# Allegro board pt100.brd
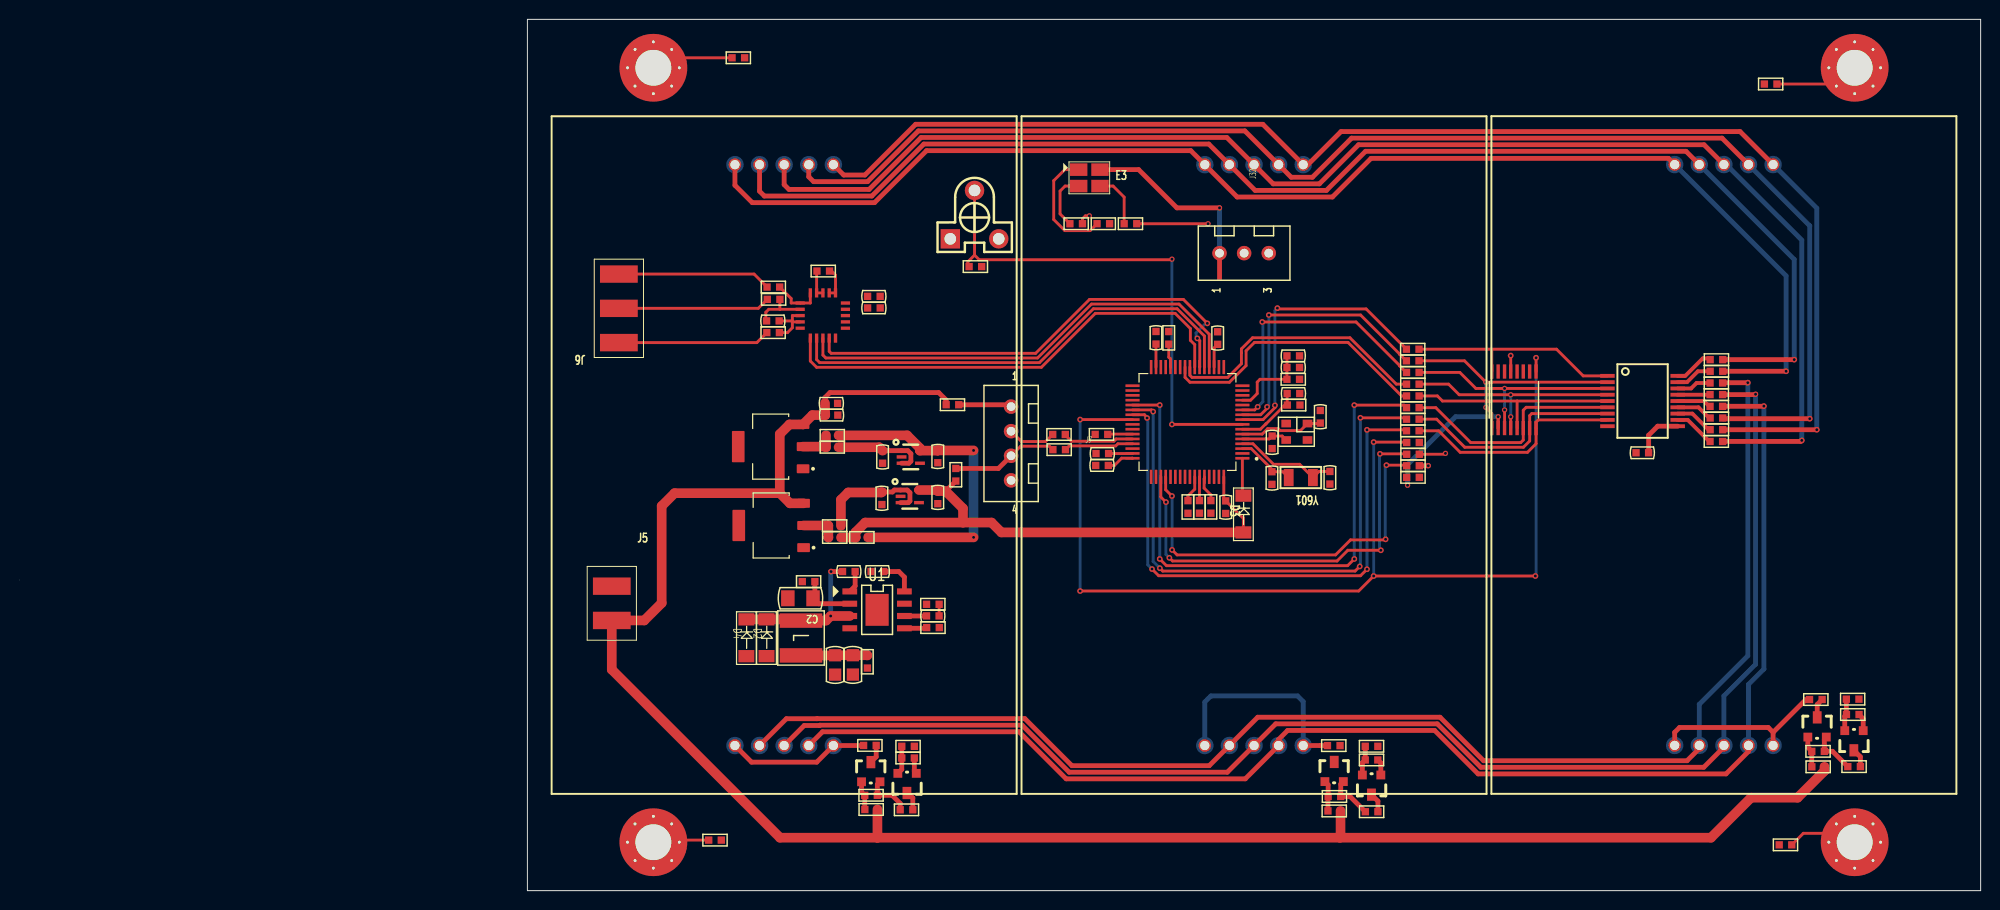
[diagram p0: board, top side]
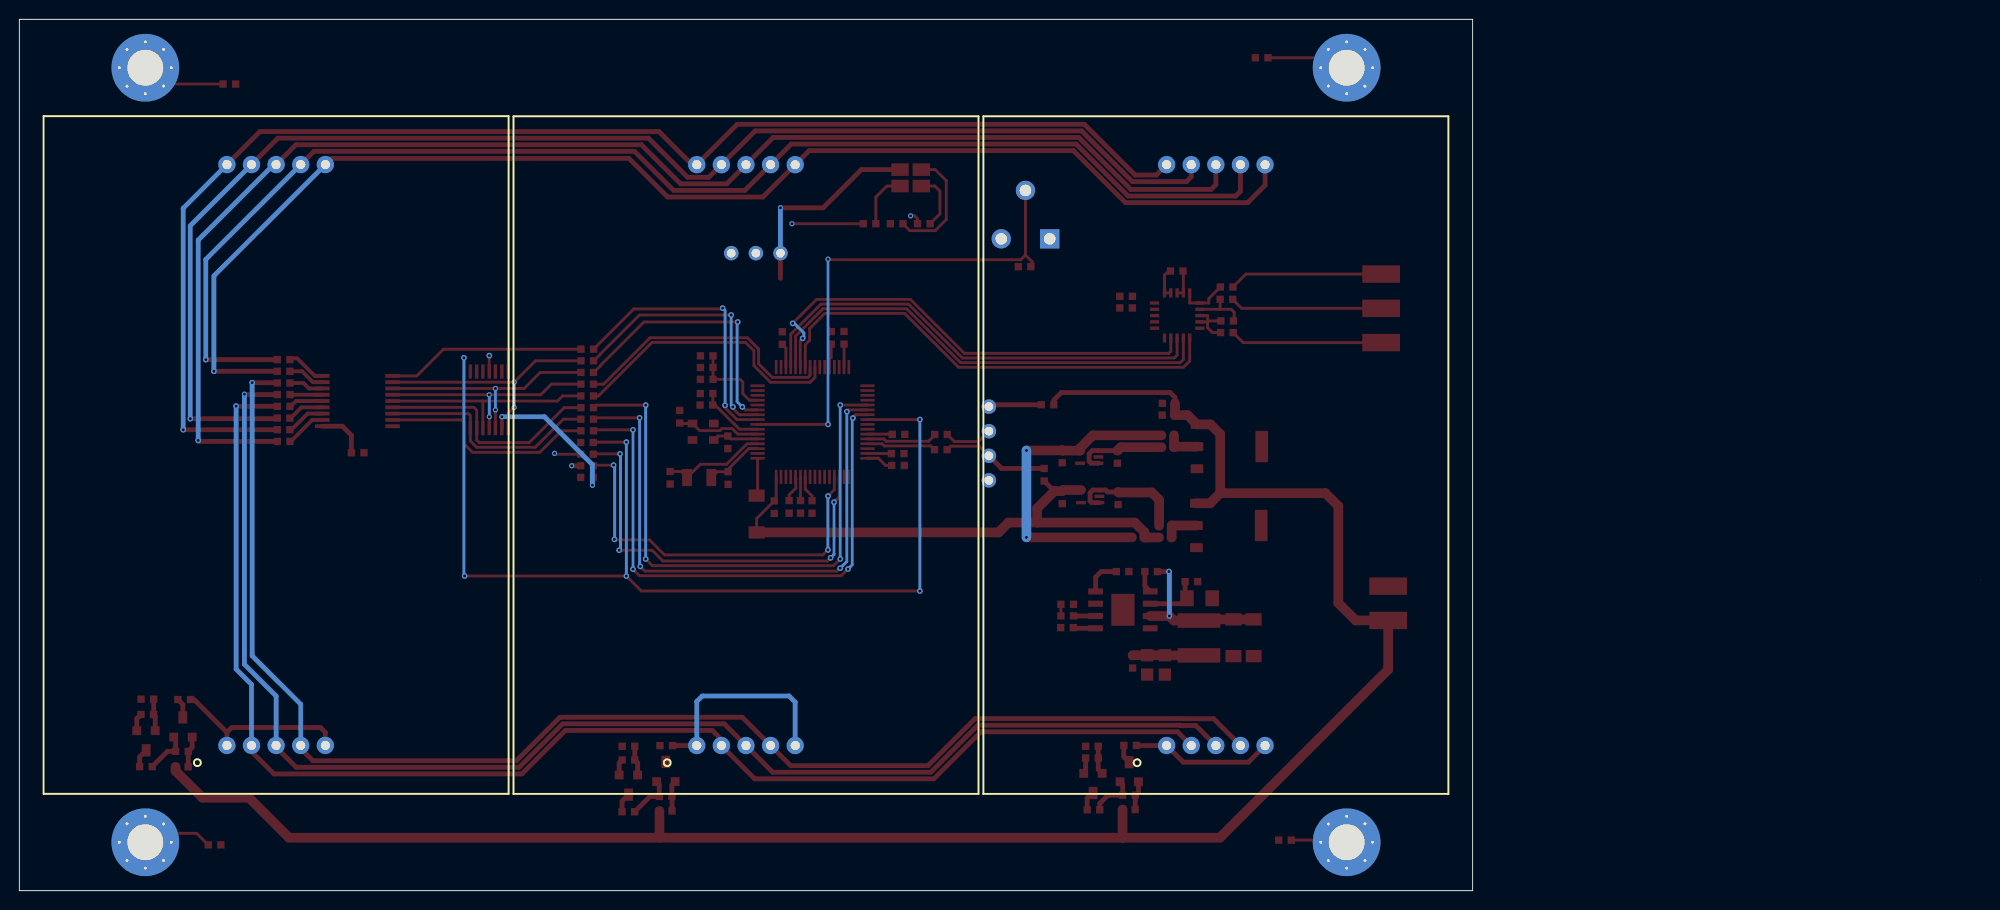
[diagram p1: board, bottom side, seen from below]

Outline 202.44 x 90 mm; copper layers: TOP, BOTTOM. Coordinates in mm from the lower left corner of the outline.
Outline path: 0,32.09 0,32.09 ; 52.44,90 52.44,0 202.44,0 202.44,90 52.44,90

## Design rules (mm)
nets with their own width: min track width 0.3; nets GND
nets with their own width: min track width 0.5; nets VBUS_R VCC12V VCC_3V3 VCC_3V3_R

## Placement (name value [footprint] x y rotation side)
C1  10nF/50V  [C0603]  86.27 32.96 180 top
C2  10uF/50V  [C1206]  80.62 30.2 180 top
C6  4.7nF/50V  [C0603]  93.64 28.38 0 top
C7  22uF/10V  [C0805]  84.2 24.31 270 top
C8  22uF/10V  [C0805]  86.03 24.32 270 top
C9  0.1uF/50V  [C0603]  89.21 32.96 180 top
C12  1uF/10V  [C0603]  89.03 41.18 270 top
C13  1uF/10V  [C0603]  94.8 41.27 270 top
C14  1uF/10V  [C0603]  89.1 45.45 270 top
C15  1uF/10V  [C0603]  94.8 45.5 270 top
C16  100nF/16V  [C0603]  132.16 51.35 180 top
C17  100nF/16V  [C0603]  112.4 43.92 180 top
C18  100nF/16V  [C0603]  117.32 56.46 90 top
C19  100nF/16V  [C0603]  112.43 45.15 180 top
C20  4.7uF/16V  [C0603]  123.69 56.43 90 top
C21  100nF/16V  [C0603]  124.52 40.26 270 top
C22  100nF/16V  [C0603]  130.84 54.04 0 top
C23  4.7uF/16V  [C0603]  130.84 55.24 0 top
C24  22pF/50V  [C0603]  129.31 46.96 270 top
C25  22pF/50V  [C0603]  134.28 48.3 90 top
C26  2.2pF/50V  [C0603]  129.29 43.27 270 top
C27  2.2pF/50V  [C0603]  135.27 43.3 270 top
C28  100nF/16V  [C0603]  88.86 60.19 180 top
C29  100nF/16V  [C0603]  88.85 61.39 180 top
C30  100nF/16V  [C0603]  78.43 58.85 180 top
C31  100nF/50V  [C0603]  166.87 45.23 0 top
C32  10uF/50V  [C0603]  84.46 50.34 180 top
C33  100nF/50V  [C0603]  84.48 49.12 180 top
D2  LMBR140FT1G  [SOD123]  77.12 28.02 270 top
D3  RB160M-30  [SOD123]  126.34 40.8 270 top
D4  LMBR140FT1G  [SOD123]  75.04 28.02 270 top
E3  RGB-LED  [LED_3528_2]  110.44 73.68 0 top
J1  TM1650  [SOP65P640X110-16N]  154.27 50.7 270 top
J2  CON10  [SEGS]  84.02 14.99 180 bottom
J3  CON10  [SEGS]  132.52 14.99 180 bottom
J4  CON10  [SEGS]  181.02 15 180 bottom
J5  CON2  [H2]  61.15 28.41 0 top
J6  CON3  [H3]  61.88 57.61 0 top
J7  4 HEADER  [XH-4]  102.37 46.19 0 top
J28  HOLE  [MTG370_700]  65.44 85 0 top
J29  HOLE  [MTG370_700]  189.44 85 0 top
J30  HOLE  [MTG370_700]  65.44 5 0 top
J31  HOLE  [MTG370_700]  189.44 5 0 top
J32  CON3  [XH-3]  126.42 65.85 90 top
L1  300R/100MHz  [R0603]  130.84 52.82 0 top
L2  60R/100MHz/2A  [R0603]  80.81 31.92 0 top
L3  4.7uH/2.2A  [L5020]  80.68 26.1 270 top
Q7  CJ3402(SOT23)  [SOT-23]  92.58 12.12 180 top
Q8  CJ2305  [SOT-23]  86.93 11.24 0 top
Q9  CJ3402(SOT23)  [SOT-23]  140.53 11.95 180 top
Q10  CJ2305  [SOT-23]  134.75 11.26 0 top
Q11  CJ3402(SOT23)  [SOT-23]  190.32 16.53 180 top
Q12  CJ2305  [SOT-23]  184.61 15.86 0 top
R3  75K/1%  [R0603]  87.53 22.99 90 top
R6  13.7K/1%  [R0603]  93.65 27.17 0 top
R7  15K  [R0603]  94.94 29.58 180 top
R13  RESISTOR TAPPED  [RH0812]  96.09 67.33 0 top
R14  10K  [R0603]  91.08 13.7 0 top
R20  1K  [R0603]  111.23 68.89 0 top
R21  510R  [R0603]  108.43 68.89 0 top
R22  330R  [R0603]  114.03 68.89 0 top
R30  100K  [R0603]  122.99 38.99 90 top
R31  4K7  [R0603]  132.18 50.16 180 top
R32  100K  [R0603]  118.64 57.75 270 top
R33  4K7  [R0603]  121.81 38.99 90 top
R34  4K7  [R0603]  120.62 38.98 90 top
R35  100K  [R0603]  98.03 64.46 0 top
R36  400R  [R0603]  83.63 64 180 top
R37  10K  [R0603]  78.48 62.35 180 top
R38  10K  [R0603]  78.5 61.08 180 top
R39  10K  [R0603]  78.45 57.64 180 top
R40  0R  [R0603]  143.17 55.93 0 top
R41  0R  [R0603]  143.17 54.73 0 top
R42  0R  [R0603]  143.18 53.53 0 top
R43  0R  [R0603]  143.18 52.32 0 top
R44  0R  [R0603]  143.18 51.1 0 top
R45  0R  [R0603]  143.18 49.89 0 top
R46  0R  [R0603]  143.18 48.7 0 top
R47  0R  [R0603]  143.18 47.5 0 top
R48  0R  [R0603]  143.2 46.29 0 top
R49  0R  [R0603]  143.2 45.08 0 top
R50  0R  [R0603]  143.2 43.89 0 top
R51  0R  [R0603]  143.2 42.69 0 top
R52  0R  [R0603]  83.5 37.7 0 top
R53  0R  [R0603]  83.26 45.8 0 top
R54  0R  [R0603]  83.51 36.48 0 top
R55  0R  [R0603]  83.26 47.03 0 top
R56  0R  [R0603]  87.61 36.49 180 top
R57  100R  [R0603]  174.52 54.85 0 top
R58  100R  [R0603]  174.52 53.65 0 top
R59  100R  [R0603]  174.51 52.44 0 top
R60  100R  [R0603]  174.51 51.24 0 top
R61  100R  [R0603]  174.51 50.03 0 top
R62  100R  [R0603]  174.52 48.82 0 top
R63  100R  [R0603]  174.52 47.61 0 top
R64  100K  [R0603]  174.51 46.4 0 top
R65  1K  [R0603]  92.38 14.91 180 top
R66  10K  [R0603]  90.92 8.35 0 top
R67  10K  [R0603]  88.44 15 180 top
R68  1K  [R0603]  88.56 9.85 180 top
R69  1K  [R0603]  88.57 8.38 180 top
R70  1K  [R0603]  140.22 14.91 180 top
R71  10K  [R0603]  138.92 13.5 0 top
R72  10K  [R0603]  138.93 8.15 0 top
R73  10K  [R0603]  136.32 14.98 180 top
R74  1K  [R0603]  136.37 8.23 180 top
R75  1K  [R0603]  136.39 9.73 180 top
R76  1K  [R0603]  189.88 19.78 180 top
R77  10K  [R0603]  188.59 18.19 0 top
R78  10K  [R0603]  188.73 12.81 0 top
R79  10K  [R0603]  186.08 19.74 180 top
R80  1K  [R0603]  186.32 12.79 180 top
R81  1K  [R0603]  186.31 14.39 180 top
R82  100K  [R0603]  111.04 47.13 0 top
R83  0R  [R0603]  95.66 50.19 0 top
R862  0R  [R0603]  73.56 86.03 0 top
R863  0R  [R0603]  181.42 83.32 180 top
R864  0R  [R0603]  71.15 5.22 0 top
R865  0R  [R0603]  182.95 4.73 180 top
R866  22R  [R0603]  106.66 47.12 0 top
R867  22R  [R0603]  106.68 45.55 0 top
R868  1.5K  [R0603]  96.66 43.61 270 top
U1  SGM6132YPS8G/TR  [SOIC8-EP]  88.53 29 0 top
U3  SGM2019-3.3YC5G/TR  [SC70-5]  91.91 40.73 0 top
U4  SGM2019-3.3YC5G/TR  [SC70-5]  92.01 44.8 0 top
U5  STM32F405RGT6  [QFP50P1200X1200X160-64N]  120.57 48.41 180 top
U6  MAX31865ATP+  [TQFN-20]  82.57 59.02 180 top
U7  TD62083AF  [SSOP18]  167.55 50.57 270 top
U8  AMS1117-33  [SOT229P700X180-4N]  79.6 37.72 90 top
U9  AMS1117-33  [SOT229P700X180-4N]  79.55 45.87 90 top
Y2  12MHz/12pF/30ppm  [OSC3225]  131.86 47.4 270 top
Y601  32.76KHz/12.5pF/20ppm  [OSC70X40]  132.27 42.67 180 top

## Library data of the parts
C1 C6-C9 C12-C33 = CAP NP: User Part Number: *; Tolerance: *
C2 = CAP NP
D2-D4 = DIODE
E3 = LED_3528_RGB
J1 = CON16C
J2-J4 = CON10
J5 = CON2
J6 J32 = CON3
J7 = 4 HEADER
J28-J31 = CON1: User Part Number: pn; Tolerance: RichardLC
L1 = BEAD: User Part Number: *; Tolerance: *
L2 = BEAD_SMALL: User Part Number: *; Tolerance: *
L3 = INDUCTOR
Q7 Q9 Q11 = MOSFET-N: room: Power_input
Q8 Q10 Q12 = MOSFET-P
R3 R6 R7 R14 R20-R22 R30-R83 R862-R868 = R: User Part Number: *; Tolerance: *
R13 = RESISTOR TAPPED
U1 = SGM6332
U3 U4 = PAM3101DBA330
U5 = STM32F405RGT6
U6 = MAX31865ATP+
U7 = TD62083
U8 U9 = AMS1117-33
Y2 = CRYSTAL-3225: Tolerance: RichardLC; User Part Number: pn
Y601 = CRYSTAL

## Footprints (pads in the part's own frame, mm; a bottom-side part is the same pattern mirrored in y, then rotated)
C0603
  rect 0.76x0.76 smd: 1(0,0) 2(1.3,0)
C0805
  rect 1.27x1.27 smd: 1(0,0) 2(2,0)
C1206
  rect 1.397x1.651 smd: 1(-1.297,0) 2(1.303,0)
H2
  rect 3.9x1.8 smd: 1(0,-0.5) 2(0,3.04)
H3
  rect 3.9x1.8 smd: 1(0,-1) 2(0,2.54) 3(0,6.08)
L5020
  rect 1.5x4.4 smd: 1(-1.8,0) 2(1.8,0)
LED_3528_2
  rect 1.8x1.3 smd: 1(-1.1,0.8) 2(-1.1,-0.9) 3(1.1,-0.9) 4(1.1,0.8)
MTG370_700
  round 1 hole 0.3: (-2.675,0) (-1.892,1.892) (-1.892,-1.892) (0,2.675) (0,-2.675) (1.892,1.892) (1.892,-1.892) (2.675,0)
  round 7 hole 3.7: 1(0,0)
OSC70X40
  rect 1.016x1.778 smd: 1(-1.25,0) 2(1.25,0)
OSC3225
  rect 0.8x1 smd: 1(-0.85,1.1) 2(-0.85,-1.1) 3(0.85,-1.1) 4(0.85,1.1)
QFP50P1200X1200X160-64N
  custom 1.47x0.28 smd: 1(-5.67,3.75) 2(-5.67,3.25) 3(-5.67,2.75) 4(-5.67,2.25) 5(-5.67,1.75) 6(-5.67,1.25) 7(-5.67,0.75) 8(-5.67,0.25) 9(-5.67,-0.25) 10(-5.67,-0.75) 11(-5.67,-1.25) 12(-5.67,-1.75) 13(-5.67,-2.25) 14(-5.67,-2.75) 15(-5.67,-3.25) 16(-5.67,-3.75) 33(5.67,-3.75) 34(5.67,-3.25) 35(5.67,-2.75) 36(5.67,-2.25) 37(5.67,-1.75) 38(5.67,-1.25) 39(5.67,-0.75) 40(5.67,-0.25) 41(5.67,0.25) 42(5.67,0.75) 43(5.67,1.25) 44(5.67,1.75) 45(5.67,2.25) 46(5.67,2.75) 47(5.67,3.25) 48(5.67,3.75)
  custom 0.28x1.47 smd: 17(-3.75,-5.67) 18(-3.25,-5.67) 19(-2.75,-5.67) 20(-2.25,-5.67) 21(-1.75,-5.67) 22(-1.25,-5.67) 23(-0.75,-5.67) 24(-0.25,-5.67) 25(0.25,-5.67) 26(0.75,-5.67) 27(1.25,-5.67) 28(1.75,-5.67) 29(2.25,-5.67) 30(2.75,-5.67) 31(3.25,-5.67) 32(3.75,-5.67) 49(3.75,5.67) 50(3.25,5.67) 51(2.75,5.67) 52(2.25,5.67) 53(1.75,5.67) 54(1.25,5.67) 55(0.75,5.67) 56(0.25,5.67) 57(-0.25,5.67) 58(-0.75,5.67) 59(-1.25,5.67) 60(-1.75,5.67) 61(-2.25,5.67) 62(-2.75,5.67) 63(-3.25,5.67) 64(-3.75,5.67)
R0603
  rect 0.76x0.76 smd: 1(0,0) 2(1.3,0)
RH0812
  round 2 hole 1.2: 1(5,0) 2(2.5,5)
  rect 2x2 hole 1.2: 3(0,0)
SC70-5
  rect 1.016x0.356 smd: 1(-0.95,0.65) 2(-0.95,0) 3(-0.95,-0.65) 4(0.95,-0.65) 5(0.95,0.65)
SEGS
  round 1.3 hole 0.95: 1(0,0) 2(2.54,0) 3(5.08,0) 4(7.62,0) 5(10.16,0) 6(10.16,60) 7(7.62,60) 8(5.08,60) 9(2.54,60) 10(0,60)
SOD123
  rect 1.27x1.651 smd: 1(3.8,0) 2(0,0)
SOIC8-EP
  rect 1.524x0.635 smd: 1(-2.819,1.905) 2(-2.819,0.635) 3(-2.819,-0.635) 4(-2.819,-1.905) 5(2.819,-1.905) 6(2.819,-0.635) 7(2.819,0.635) 8(2.819,1.905)
  rect 2.4x3.3 smd: 9(0,0)
SOP65P640X110-16N
  rect 1.473x0.356 smd: 1(-2.921,2.286) 2(-2.921,1.626) 3(-2.921,0.965) 4(-2.921,0.33) 5(-2.921,-0.33) 6(-2.921,-0.965) 7(-2.921,-1.626) 8(-2.921,-2.286) 9(2.921,-2.286) 10(2.921,-1.626) 11(2.921,-0.965) 12(2.921,-0.33) 13(2.921,0.33) 14(2.921,0.965) 15(2.921,1.626) 16(2.921,2.286)
SOT229P700X180-4N
  custom 0.93x1.31 smd: 1(-2.29,-1.345) 2(0,-1.345) 3(2.29,-1.345)
  custom 3.24x1.31 smd: 4(0,5.345)
SOT-23
  rect 0.914x0.914 smd: 1(1.905,0) 2(0,0)
  rect 0.914x1.27 smd: 3(0.965,2.032)
SSOP18
  rect 0.4x1.5 smd: 1(-2.6,-3.625) 2(-1.95,-3.625) 3(-1.3,-3.625) 4(-0.65,-3.625) 5(0,-3.625) 6(0.65,-3.625) 7(1.3,-3.625) 8(1.95,-3.625) 9(2.6,-3.625) 10(2.6,3.625) 11(1.95,3.625) 12(1.3,3.625) 13(0.65,3.625) 14(0,3.625) 15(-0.65,3.625) 16(-1.3,3.625) 17(-1.95,3.625) 18(-2.6,3.625)
TQFN-20
  rect 0.35x0.95 smd: BIAS(-1.67,-2.72) CS(-0.37,1.95) DGND(-1.67,1.95) FORCE+(0.93,-2.72) ISENSOR(0.28,-2.72) REFIN+(-1.02,-2.72) REFIN-(-0.37,-2.72) SCLK(0.28,1.95) SD0(-1.02,1.95) SDI(0.93,1.95)
  rect 0.95x0.35 smd: DRDY(-2.694,-0.374) DVDD(-2.694,-1.024) FORCE2(1.976,-1.675) FORCE-(1.976,0.276) GND1(-2.694,0.925) GND2(1.976,0.925) NC(-2.694,0.276) RTDIN+(1.976,-1.024) RTDIN-(1.976,-0.374) VDD(-2.694,-1.675)
XH-3
  round 1.5 hole 0.9: 1(0,2.54) 2(0,0) 3(0,-2.54)
XH-4
  round 1.5 hole 0.9: 1(0,3.81) 2(0,1.27) 3(0,-1.27) 4(0,-3.81)

## Nets
GND: C2.2 C7.2 C8.2 C9.2 C12.2 C13.2 C14.2 C15.2 C16.1 C17.2 C18.2 C19.2 C20.2 C21.2 C22.2 C23.2 C24.2 C25.2 C26.2 C27.2 C28.1 C29.1 C31.1 C32.1 C33.1 D2.1(A) D4.1(A) J1.4 J5.2 J7.4 J32.3 R6.2 R7.2 R13.1(A) R30.1 R32.1 R862.2 R863.2 R864.2 R865.2 U1.4(GND) U1.9(EP) U3.2(GND) U4.2(GND) U5.12(VSSA) U5.18(VSS) U5.63(VSS__1) U6.DGND U6.GND1 U6.GND2 U7.9(GND) U8.1(ADJ/GND) U9.1(ADJ/GND) Y2.2(GND#2) Y2.4(GND#4)
VBUS_R: C14.1 J7.1 R53.2 R83.2 U4.1(VIN) U4.3(EN)
VCC12V: C32.2 C33.2 J5.1 L2.1 R69.1 R74.1 R80.1 R83.1 U8.3(VIN) U9.3(VIN)
VCC_3V3: C7.1 C8.1 C13.1 C17.1 C20.1 C21.1 D3.1(A) E3.4(COM) J1.10 J32.1 L1.2 L3.2 R3.2 R31.1 R33.1 R34.1 R54.2 R56.2 R82.1 R868.2 U3.5(VOUT) U5.19(VDD) U5.32(VDD__1) U5.48(VDD__2) U5.64(VDD__3)
VCC_3V3_R: C15.1 C28.2 C29.2 R35.2 R55.2 R56.1 U4.5(VOUT) U6.DVDD U6.VDD
A: J1.8 R40.2 U7.1(I1)
B: J1.9 R41.2 U7.2(I2)
C: J1.11 R42.2 U7.3(I3)
D: J1.12 R43.2 U7.4(I4)
DIG1: R48.2 R65.1
DIG2: R49.2 R70.1
DIG3: R50.2 R76.1
DIG4: R51.2
DP: J1.16 R47.2 U7.8(I8)
DRDY: U6.DRDY
E: J1.13 R44.2 U7.5(I5)
F: J1.14 R45.2 U7.6(I6)
G: J1.15 R46.2 U7.7(I7)
OUT_A: J2.7 J3.7 J4.7 R57.2
OUT_B: J2.6 J3.6 J4.6 R58.2
OUT_C: J2.4 J3.4 J4.4 R59.2
OUT_D: J2.3 J3.3 J4.3 R60.2
OUT_DP: J2.8 J3.8 J4.8 R64.2
OUT_E: J2.2 J3.2 J4.2 R61.2
OUT_F: J2.9 J3.9 J4.9 R62.2
OUT_G: J2.10 J3.10 J4.10 R63.2
PA0: U5.14(PA0/WKUP)
PA1: U5.15(PA1/USART2_RTS)
PA2: U5.16(PA2/USART2_TX)
PA3: U5.17(PA3/USART2_RX)
PA4_X5: U5.20(PA4/USART2_CK) U6.CS
PA5_X6: U5.21(PA5/SPI1_SCK) U6.SCLK
PA6_X7: U5.22(PA6/SPI1_MISO) U6.SD0
PA7_X8: U5.23(PA7/SPI1_MOSI) U6.SDI
PA8: U5.41(PA8)
PA9: U5.42(PA9)
PA10: R82.2 U5.43(PA10)
PA11-DM: R866.2 U5.44(PA11)
PA12-DP: R867.2 U5.45(PA12)
PA13: U5.46(PA13/JMS-SWDIO)
PA14: U5.49(PA14/JTCK-SWCLK)
PA15: U5.50(PA15)
PB0: U5.26(PB0)
PB1: U5.27(PB1)
PB2: R32.2 U5.28(PB2/BOOT1)
PB3: U5.55(PB3)
PB4: U5.56(PB4)
PB5: U5.57(PB5)
PB6_SCL: J1.2
PB6_SCL1: R34.2 U5.58(PB6)
PB7_SDA: J1.3
PB7_SDA1: R33.2 U5.59(PB7)
PB8: U5.61(PB8)
PB9: U5.62(PB9)
PB10: U5.29(PB10)
PB11: U5.30(PB11)
PB12: U5.33(PB12)
PB13: R20.2 U5.34(PB13)
PB14: R21.2 U5.35(PB14)
PB15: R22.2 U5.36(PB15)
PC0_X19: R13.2(TAP) R35.1 U5.8(PC0)
PC1: R40.1 U5.9(PC1)
PC2: R41.1 U5.10(PC2/SPI2_MISO)
PC3: R42.1 U5.11(PC3/SPI2_MOSI)
PC4: R43.1 U5.24(PC4)
PC5: R44.1 U5.25(PC5)
PC6: R45.1 U5.37(PC6)
PC7: R46.1 U5.38(PC7)
PC8: R47.1 U5.39(PC8)
PC9_DIG1: J1.1 R48.1 U5.40(PC9)
PC9_DIG2: J1.5
PC9_DIG3: J1.6
PC9_DIG4: J1.7
PC10_DIG2: R49.1 U5.51(PC10)
PC11_DIG3: R50.1 U5.52(PC11)
PC12_DIG4: R51.1 U5.53(PC12)
PC13: U5.2(PC13/RTC_OUT)
SHELL_CHS_GND1: J28.1 R862.1
SHELL_CHS_GND2: J29.1 R863.1
SHELL_CHS_GND3: J30.1 R864.1
SHELL_CHS_GND4: J31.1 R865.1
N16749596: C12.1 R52.2 U3.1(VIN) U3.3(EN)
N16823930: E3.1(R) R20.1
N16823933: E3.2(G) R21.1
N16823936: E3.3(B) R22.1
N16868265: J32.2 R30.2 U5.60(BOOT0)
N16868313: C16.2 R31.2 U5.7(NRST)
N16869129: C18.1 U5.31(VCAP_1)
N16869139: C19.1 U5.47(VCAP_2)
N16869862: C22.1 C23.1 L1.1 U5.13(VDDA)
N16870554: C26.1 U5.3(PC14/OSC32_IN) Y601.2
N16870563: C27.1 U5.4(PC15/OSC32_OUT) Y601.1
N16871213: C24.1 U5.5(PH0/OSC_IN) Y2.3(XOUT)
N16871216: C25.1 U5.6(PH1/OSC_OUT) Y2.1(XIN)
N16873755: R36.1 U6.BIAS U6.REFIN+
N16873767: R36.2 U6.ISENSOR U6.REFIN-
N16874223: R37.1 U6.FORCE2 U6.FORCE+
N16874262: C30.1 R39.1 U6.FORCE- U6.RTDIN-
N16874265: C30.2 R38.1 U6.RTDIN+
N16876063: J6.1 R39.2
N16876066: J6.2 R38.2
N16876069: J6.3 R37.2
N16877545: R57.1 U7.18(O1)
N16877549: R58.1 U7.17(O2)
N16877553: R59.1 U7.16(O3)
N16877557: R60.1 U7.15(O4)
N16877561: R61.1 U7.14(O5)
N16877565: R62.1 U7.13(O6)
N16877569: R63.1 U7.12(O7)
N16877573: R64.1 U7.11(O8)
N16877577: C31.2 U7.10(COMMEN)
N16881202: J2.1 J2.5 R67.2
N16881220: J3.1 J3.5 R73.2
N16881239: J4.1 J4.5 R79.2
N16882760: R52.1 R54.1 U8.2(VOUT)
N16882763: R53.1 R55.1 U9.2(VOUT)
N16884629: D3.2(K) U5.1(VBAT)
N16887232: Q7.1(GATE) R14.1 R65.2
N16887234: Q7.2(SOURCE) R14.2
N16887985: Q8.3(DRAIN) R67.1
N16888135: Q8.1(GATE) R66.1 R68.1
N16888148: Q8.2(SOURCE) R68.2 R69.2
N16889232: Q9.2(SOURCE) R71.2
N16889234: Q9.1(GATE) R70.2 R71.1
N16889252: Q10.3(DRAIN) R73.1
N16889280: Q10.1(GATE) R72.1 R75.1
N16889282: Q10.2(SOURCE) R74.2 R75.2
N16890007: Q11.1(GATE) R76.2 R77.1
N16890009: Q11.2(SOURCE) R77.2
N16890028: Q12.3(DRAIN) R79.1
N16890058: Q12.2(SOURCE) R80.2 R81.2
N16890062: Q12.1(GATE) R78.1 R81.1
N16893938: C2.1 L2.2 U1.2(IN)
N16893954: C9.1 U1.8(SS)
N16893996: C6.1 U1.6(COMP)
N16893998: R3.1 R6.1 U1.5(FB)
N16894036: C1.2 D2.2(K) D4.2(K) L3.1 U1.3(SW)
N16894056: C1.1 U1.1(BS)
N16899965: J7.2 R866.1
N16899968: J7.3 R867.1 R868.1
N168879501: Q7.3(DRAIN) R66.2
N168892401: Q9.3(DRAIN) R72.2
N168900031: Q11.3(DRAIN) R78.2
N168939841: C6.2 R7.1

Pads without a net: R13 3; U1 7; U3 4; U4 4; U5 54; U6 NC; U8 4; U9 4

## Via types
v1: diameter 0.6, hole 0.3, TOP to BOTTOM, 47 vias
v2: diameter 0.55, hole 0.3, TOP to BOTTOM, 15 vias

## Routing (per net, layer and track width the routed paths; a pad name or vN(x,y) marks a point on that pad's centre or on a via; arc(x,y) is an arc through that point)
VBUS_R: length 15
  TOP w0.5: U4.3 91.82,44.15 92.02,44.35 92.02,45.13 91.7,45.45 U4.1 C14.1 ; J7.1 102.18,50.19 R83.2
  TOP w1: R53.2 88.75,45.8 C14.1
VCC12V: length 204.9
  TOP w0.5: C32.2 83.16,50.94 83.67,51.45 94.89,51.45 95.66,50.68 R83.1
  TOP w1: U8.3 79.54,40.01 78.49,41.06 ; 88.57,5.47 78.51,5.47 61.15,22.83 J5.1 64.5,27.91 66.3,29.71 66.3,39.73 67.63,41.06 78.49,41.06 ; 88.57,5.47 136.31,5.47 ; 88.57,5.47 R69.1 ; C32.2 83.16,49.29 83.18,49.27 C33.2 81.86,49.12 U9.3 79.49,48.16 78.49,47.16 78.49,41.06 ; R74.1 136.37,5.53 136.31,5.47 ; 136.31,5.47 174.61,5.47 178.74,9.6 183.55,9.6 186.32,12.37 R80.1
VCC_3V3: length 105.9
  TOP w0.3: U5.64 124.32,40.46 C21.1 126.34,38.44 D3.1 ; C20.1 123.32,56.06 U5.19 ; C17.1 113.03,43.92 113.78,44.67 114.89,44.67 U5.48
  TOP w0.356: J1.10 v2(152.64,48.95)
  TOP w0.5: J32.1 123.88,63.25 ; v2(123.88,70.53) 119.48,70.53 115.53,74.48 E3.4 ; R868.2 95.62,41.27 95.61,41.27
  TOP w1: R54.2 86.3,36.48 R56.2 86.31,37.02 87.31,38.02 97.4,38.02 ; L3.2 84.18,24.3 C7.1 86.03,24.31 C8.1 87.5,24.32 R3.2 ; 97.4,38.02 97.4,39.48 95.61,41.27 C13.1 94.69,41.38 U3.5 ; 97.4,38.02 100.35,38.02 101.37,37 D3.1
  BOTTOM w0.5: v2(143.29,41.88) 143.29,44 148.24,48.95 v2(152.64,48.95) ; v2(123.88,70.53) J32.1
VCC_3V3_R: length 34.6
  TOP w1: R56.1 v1(98.49,36.49) ; R55.2 91.63,47.03 92.96,45.7 U4.5 94.75,45.45 C15.1 94.83,45.47 v1(98.49,45.47)
  BOTTOM w1: v1(98.49,36.49) v1(98.49,45.47)
A: length 22.9
  TOP w0.3: R40.2 151.98,55.93 ; 151.98,55.93 158.66,55.93 161.41,53.17 U7.1 ; 151.98,55.93 J1.8
B: length 25.4
  TOP w0.3: U7.2 v2(151.37,52.52) 149.16,54.73 R41.2 ; J1.9 151.98,49.31 v2(151.37,49.92)
  BOTTOM w0.3: v2(151.37,49.92) v2(151.37,52.52)
C: length 24.2
  TOP w0.3: J1.11 v2(153.3,49.66) ; R42.2 148.68,53.53 150.34,51.87 v2(153.3,51.87) U7.3
  BOTTOM w0.3: v2(153.3,49.66) v2(153.3,51.87)
D: length 23.3
  TOP w0.3: J1.12 v2(153.94,48.95) ; U7.4 v2(153.94,51.22) 148.62,51.22 147.52,52.32 R43.2
  BOTTOM w0.3: v2(153.94,48.95) v2(153.94,51.22)
DIG2: length 2.7
  TOP w0.3: R49.2 147.11,45.08 v2(147.2,45.17)
DIG3: length 0.9
  TOP w0.5: R50.2 v2(145.43,43.89)
DP: length 23.1
  TOP w0.3: R47.2 146.5,47.5 148.72,45.27 155.66,45.27 156.55,46.16 J1.16 156.55,48.39 156.79,48.62 U7.8
E: length 22.5
  TOP w0.3: 154.6,50.57 J1.13 ; 154.6,50.57 146.89,50.57 146.37,51.1 R44.2 ; 154.6,50.57 U7.5
F: length 24.2
  TOP w0.3: U7.6 155.53,49.92 155.23,49.62 J1.14 155.23,46.55 154.96,46.28 149.81,46.28 146.2,49.89 R45.2
G: length 23.6
  TOP w0.3: R46.2 146.29,48.7 149.19,45.8 155.25,45.8 155.89,46.45 J1.15 155.89,49.06 156.1,49.27 U7.7
OUT_A: length 138
  TOP w0.5: J2.7 76.4,72.25 76.9,71.75 87.99,71.75 93.36,77.12 122.77,77.12 J3.7 127.56,72.33 134.91,72.33 138.95,76.37 172.03,76.37 J4.7 ; R57.2 v1(183.2,54.85)
  BOTTOM w0.5: v1(183.2,54.85) 183.2,65.2 J4.7
OUT_B: length 138.7
  TOP w0.5: R58.2 v1(182.36,53.65) ; J4.6 170.22,75.64 139.52,75.64 135.53,71.65 125.7,71.65 J3.6 120.91,76.44 93.64,76.44 88.27,71.07 75.65,71.07 73.86,72.86 J2.6
  BOTTOM w0.5: v1(182.36,53.65) 182.36,63.5 J4.6
OUT_C: length 147.1
  TOP w0.5: J2.4 79.17,17.76 82.33,17.76 82.34,17.77 103.78,17.77 108.64,12.91 122.82,12.91 J3.4 127.82,17.91 146.64,17.91 151.13,13.42 172.14,13.42 173.4,14.68 J4.4 ; R59.2 175.84,52.47 v1(178.41,52.47)
  BOTTOM w0.5: J4.4 173.4,19.25 178.41,24.26 v1(178.41,52.47)
OUT_D: length 145.9
  TOP w0.5: R60.2 179.17,51.24 v2(179.21,51.28) ; J4.3 175.94,14.82 173.86,12.74 150.85,12.74 146.36,17.23 129.68,17.23 J3.3 124.68,12.23 108.36,12.23 103.5,17.09 82.62,17.09 82.59,17.06 81.01,17.06 J2.3
  BOTTOM w0.5: J4.3 175.94,20.11 179.21,23.38 v2(179.21,51.28)
OUT_DP: length 146.2
  TOP w0.5: v1(183.98,46.51) 183.87,46.4 R64.2 ; J2.8 78.94,72.93 79.44,72.43 87.71,72.43 93.08,77.8 124.63,77.8 J3.8 129.42,73.01 134.19,73.01 138.23,77.05 173.89,77.05 J4.8
  BOTTOM w0.5: v1(183.98,46.51) 183.98,67.2 176.18,75 J4.8
OUT_E: length 145.5
  TOP w0.5: R61.2 180.05,50.03 v1(180.07,50.05) ; J2.2 82.9,16.41 103.19,16.41 108.05,11.55 126.54,11.55 J3.2 129.98,15.62 130.91,16.55 146.08,16.55 150.57,12.06 176.16,12.06 178.48,14.38 J4.2
  BOTTOM w0.5: v1(180.07,50.05) 180.07,22.89 178.48,21.3 J4.2
OUT_F: length 143.3
  TOP w0.5: J2.9 81.48,73.74 81.98,73.24 87.55,73.24 92.79,78.48 126.49,78.48 J3.9 131.28,73.69 133.47,73.69 137.51,77.73 175.75,77.73 J4.9 ; R62.2 175.89,48.75 v1(184.8,48.75)
  BOTTOM w0.5: J4.9 184.8,68.68 v1(184.8,48.75)
OUT_G: length 143.1
  TOP w0.5: R63.2 v1(185.53,47.61) ; J4.10 177.61,78.41 136.42,78.41 133,74.99 J3.10 128.35,79.16 92.51,79.16 87.27,73.92 85.09,73.92 J2.10
  BOTTOM w0.5: J4.10 185.53,70.49 v1(185.53,47.61)
PA4_X5: length 48.7
  TOP w0.3: 82.94,57.08 82.94,55.32 83.24,55.02 105.09,55.02 110.66,60.59 119.7,60.59 122.82,57.47 U5.20
PA5_X6: length 49.1
  TOP w0.3: 82.29,57.08 82.29,54.86 82.61,54.54 105.29,54.54 110.86,60.11 119.5,60.11 122.32,57.29 U5.21
PA6_X7: length 49.1
  TOP w0.3: v1(122.62,58.6) 120.15,61.07 110.46,61.07 104.89,55.5 83.8,55.5 83.59,55.71 83.59,57.08 ; U5.22 121.84,54.1 121.84,56.8 v1(121.59,57.05)
  BOTTOM w0.3: v1(122.62,58.6) 122.45,58.6 121.46,57.61 121.46,57.18 v1(121.59,57.05)
PA7_X8: length 49
  TOP w0.3: 81.64,57.08 81.64,54.71 82.29,54.06 105.49,54.06 111.06,59.63 119.3,59.63 120.87,58.06 120.87,56.85 121.32,56.4 U5.23
PA10: length 2.6
  TOP w0.3: R82.2 112.37,47.16 U5.43
PA11-DM: length 7.4
  TOP w0.3: R866.2 107.96,47.05 108.59,46.42 112.97,46.42 113.21,46.66 U5.44
PA12-DP: length 7.2
  TOP w0.3: R867.2 108.37,45.94 113.17,45.94 113.39,46.16 U5.45
PB2: length 2.4
  TOP w0.3: U5.28 118.82,54.92 118.64,55.1 R32.2
PB6_SCL1: length 2.7
  TOP w0.3: R34.2 120.62,40.77 121.32,41.47 U5.58
PB7_SDA1: length 2.5
  TOP w0.3: R33.2 121.81,42.73 U5.59
PB14: length 1.3
  TOP w0.3: v2(110.44,69.7) 110.03,69.7 109.73,69.41 R21.2
PB15: length 7.4
  TOP w0.3: R22.2 v2(122.7,68.89)
PC0_X19: length 53.2
  TOP w0.3: 98.59,65.65 R13.2 ; 98.59,65.65 99.07,65.17 118.91,65.17 v2(118.97,65.23) ; 98.59,65.65 97.9,64.95 97.9,64.59 R35.1 ; U5.8 v1(118.97,48.16)
  BOTTOM w0.3: v1(118.97,48.16) v2(118.97,65.23)
PC1: length 29.3
  TOP w0.3: R40.1 139.01,60.09 129.93,60.09 v1(129.85,60.17) ; U5.9 128.37,48.66 129.6,49.89 v1(129.6,50.13)
  BOTTOM w0.3: v1(129.6,50.13) 129.6,59.92 v1(129.85,60.17)
PC2: length 28.7
  TOP w0.3: U5.10 128.13,49.16 128.78,49.81 128.78,49.96 v1(128.79,49.97) ; v1(128.97,59.46) 138.44,59.46 142.46,55.44 142.46,55.41 143.14,54.73 R41.1
  BOTTOM w0.3: v1(128.97,59.46) 128.97,50.15 v1(128.79,49.97)
PC3: length 27.8
  TOP w0.3: R42.1 143.14,53.53 142.46,54.21 142.46,54.25 137.97,58.74 v1(128.29,58.74) ; v1(127.82,49.97) 127.51,49.66 U5.11
  BOTTOM w0.3: v1(128.29,58.74) 128.36,58.67 128.36,50.51 v1(127.82,49.97)
PC4: length 27.9
  TOP w0.3: R43.1 142.13,52.32 137.34,57.11 127.29,57.11 126.14,55.96 126.14,55.56 126.14,54.43 124.72,53.02 121.04,53.02 120.82,53.24 U5.24
PC5: length 29
  TOP w0.3: U5.25 120.32,53.02 120.83,52.51 124.9,52.51 126.62,54.23 126.62,55.76 127.49,56.63 137.14,56.63 142.67,51.1 R44.1
PC6: length 60.7
  TOP w0.3: U5.37 v1(117.71,50.16) ; v1(137.79,34.26) 137.1,33.57 118.4,33.57 v1(117.71,34.26) ; R45.1 142.92,50.15 v1(137.79,50.15)
  BOTTOM w0.3: v1(117.71,50.16) v1(117.71,34.26) ; v1(137.79,34.26) v1(137.79,50.15)
PC7: length 59.8
  TOP w0.3: v1(138.42,48.84) 143.04,48.84 R46.1 ; v1(117.03,49.48) 116.85,49.66 U5.38 ; v1(138.35,33.49) 137.87,33.01 118.02,33.01 v1(117.72,33.31)
  BOTTOM w0.3: v1(117.72,33.31) 117.03,34 v1(117.03,49.48) ; v1(138.35,33.49) 138.42,33.56 v1(138.42,48.84)
PC8: length 58.8
  TOP w0.3: v1(139.1,47.6) 143.08,47.6 R47.1 ; v1(116.91,33.22) 117.6,32.53 138.43,32.53 v1(139.1,33.2) ; U5.39 116.13,49.16 116.43,48.86 116.43,48.85 v1(116.4,48.82)
  BOTTOM w0.3: v1(116.4,48.82) 116.47,48.75 116.47,33.66 v1(116.91,33.22) ; v1(139.1,33.2) v1(139.1,47.6)
PC9_DIG1: length 112
  TOP w0.3: R48.1 143.16,46.33 v1(139.79,46.33) ; U5.40 v1(109.49,48.66) ; J1.1 v1(156.55,55.04) ; v1(109.49,30.95) 138.24,30.95 v1(139.79,32.5) v1(156.48,32.5)
  BOTTOM w0.3: v1(139.79,32.5) v1(139.79,46.33) ; v1(156.48,32.5) 156.55,32.57 v1(156.55,55.04) ; v1(109.49,48.66) v1(109.49,30.95)
PC9_DIG2: length 1.6
  TOP w0.3: J1.5 v1(153.94,55.27)
PC10_DIG2: length 44
  TOP w0.3: R49.1 143.16,45.12 v1(140.44,45.12) ; v1(118.7,34.38) 119.03,34.05 136.01,34.05 137.12,35.16 v1(140.53,35.16) ; U5.51 117.82,40.66 v1(118.35,40.13)
  BOTTOM w0.3: v1(140.53,35.16) 140.39,35.3 140.39,45.07 v1(140.44,45.12) ; v1(118.35,40.13) 118.35,34.73 v1(118.7,34.38)
PC11_DIG3: length 40.6
  TOP w0.3: v1(141.02,36.29) 140.99,36.29 140.93,36.23 137.4,36.23 135.85,34.68 119.5,34.68 v1(118.98,35.2) ; U5.52 118.32,41.41 v1(118.97,40.76) ; R50.1 143.14,43.95 v1(141.11,43.95)
  BOTTOM w0.3: v1(141.11,43.95) 140.99,43.83 140.99,36.32 v1(141.02,36.29) ; v1(118.97,40.76) 118.98,40.75 v1(118.98,35.2)
SHELL_CHS_GND1: length 8.5
  TOP w0.3: R862.1 66.47,86.03 J28.1
SHELL_CHS_GND2: length 9.7
  TOP w0.3: R863.1 189.44,83.32 J29.1
SHELL_CHS_GND3: length 5.8
  TOP w0.3: R864.1 65.66,5.22 J30.1
SHELL_CHS_GND4: length 7.4
  TOP w0.3: J31.1 188.52,5.92 184.14,5.92 R865.1
N16749596: length 12.2
  TOP w0.5: U3.3 91.76,40.08 91.92,40.24 91.92,41.11 91.65,41.38 U3.1 90.32,41.38 90.12,41.18 C12.1
  TOP w1: C12.1 88.98,41.13 85.55,41.13 84.8,40.38 R52.2
N16823930: length 12.3
  TOP w0.3: E3.1 107.91,74.48 106.76,73.34 106.76,69.32 107.91,68.18 110.52,68.18 R20.1
N16823933: length 5.9
  TOP w0.3: R21.1 107.42,69.9 107.42,72.26 107.94,72.78 E3.2
N16823936: length 5.7
  TOP w0.3: E3.3 112.89,72.78 114.03,71.64 R22.1
N16868265: length 2.8
  TOP w0.3: U5.60 122.32,42.56 122.29,42.53 122.29,41.58 122.99,40.88 R30.2
N16868313: length 6.9
  TOP w0.3: U5.7 128.1,47.66 128.65,48.21 128.67,48.21 130.62,50.16 R31.2 130.86,50.18 C16.2
N16869129: length 2.4
  TOP w0.3: C18.1 U5.31
N16869139: length 2.5
  TOP w0.3: U5.47 114.89,45.15 C19.1
N16869862: length 8.6
  TOP w0.3: U5.13 127.08,50.66 127.77,51.35 127.77,52.53 128.06,52.82 L1.1 C22.1 C23.1
N16870554: length 6.2
  TOP w0.3: Y601.2 130.42,43.27 C26.1 129.29,43.52 127.15,45.66 U5.3
N16870563: length 10.7
  TOP w0.3: C27.1 134.15,43.3 Y601.1 132.15,44.04 129.45,44.04 127.33,46.16 U5.4
N16871213: length 4.8
  TOP w0.3: Y2.3 130.35,46.96 C24.1 129.01,46.66 U5.5
N16871216: length 8.7
  TOP w0.3: C25.1 134.23,48.25 Y2.1 132.23,47.52 130.12,47.52 129.91,47.73 128.85,47.73 128.28,47.16 U5.6
N16873755: length 3.3
  TOP w0.3: U6.REFIN+ U6.BIAS 84.24,63.59 83.83,64 R36.1
N16873767: length 2.9
  TOP w0.3: U6.REFIN- U6.ISENSOR 82.29,63.97 R36.2
N16874223: length 5.2
  TOP w0.3: U6.FORCE+ 81.64,60.7 U6.FORCE2 79.67,60.7 79.67,61.16 R37.1
N16874262: length 5.8
  TOP w0.3: R39.1 79.28,57.64 79.79,58.15 79.79,58.75 ; 79.79,58.75 79.79,58.85 ; 79.79,58.75 U6.FORCE- ; 79.79,58.85 79.79,59.4 U6.RTDIN- ; 79.79,58.85 C30.1
N16874265: length 5.6
  TOP w0.3: 78.5,60.05 77.35,60.05 77.05,59.75 77.05,58.93 C30.2 ; 78.5,60.05 U6.RTDIN+ ; 78.5,60.05 R38.1
N16876063: length 15.7
  TOP w0.3: R39.2 76.12,56.61 J6.1
N16876066: length 15.7
  TOP w0.3: R38.2 76.27,60.15 J6.2
N16876069: length 15.9
  TOP w0.3: J6.3 75.84,63.69 R37.2
N16877545: length 4.2
  TOP w0.4: U7.18 171.95,53.17 173.76,54.98 174.39,54.98 R57.1
N16877549: length 3.8
  TOP w0.4: U7.17 172.13,52.52 173.26,53.65 R58.1
N16877553: length 3.6
  TOP w0.4: U7.16 172.55,51.87 173.12,52.44 R59.1
N16877557: length 3.3
  TOP w0.4: U7.15 174.49,51.22 R60.1
N16877561: length 3.6
  TOP w0.4: U7.14 173.88,50.57 174.42,50.03 R61.1
N16877565: length 3.8
  TOP w0.4: U7.13 173.32,49.92 174.42,48.82 R62.1
N16877569: length 4
  TOP w0.4: U7.12 172.69,49.27 174.35,47.61 R63.1
N16877573: length 4.3
  TOP w0.4: R64.1 174.43,46.4 172.21,48.62 U7.11
N16877577: length 5.2
  TOP w0.5: U7.10 169.1,47.97 168.17,47.04 C31.2
N16881202: length 14.7
  TOP w0.5: R67.2 87.13,14.99 J2.1 82.3,13.27 75.58,13.27 J2.5
N16881220: length 22.2
  TOP w0.5: J3.1 134.28,14.99 134.29,14.98 R73.2
  BOTTOM w0.5: J3.1 132.52,19.53 131.94,20.11 122.99,20.11 122.36,19.48 J3.5
N16881239: length 18.4
  TOP w0.5: 181.02,16.35 184.38,19.71 184.75,19.71 R79.2 ; 181.02,16.35 J4.1 ; 181.02,16.35 180.52,16.85 171.36,16.85 170.86,16.35 J4.5
N16882760: length 3.8
  TOP w1: R54.1 83.5,36.49 R52.1 83.48,37.72 U8.2
N16882763: length 3.6
  TOP w1: R55.1 R53.1 83.19,45.87 U9.2
N16884629: length 3.9
  TOP w0.3: D3.2 126.24,40.91 U5.1
N16887232: length 3
  TOP w0.5: Q7.1 91.08,12.52 R14.1 R65.2
N16887234: length 1.7
  TOP w0.5: R14.2 92.38,12.32 Q7.2
N16887985: length 2
  TOP w0.5: R67.1 88.44,13.82 Q8.3
N16888135: length 4.9
  TOP w0.5: Q8.1 88.56,10.97 R68.1 90.08,9.85 90.92,9.01 R66.1
N16888148: length 3
  TOP w0.5: Q8.2 86.93,10.18 R68.2 87.26,8.39 R69.2
N16889232: length 1.7
  TOP w0.5: R71.2 140.53,13.19 Q9.2
N16889234: length 3.1
  TOP w0.5: R70.2 R71.1 138.62,13.2 Q9.1
N16889280: length 4.8
  TOP w0.5: Q10.1 136.39,10.99 R75.1 137.35,9.73 R72.1
N16889282: length 3.2
  TOP w0.5: Q10.2 135.09,10.93 R75.2 135.07,9.71 R74.2
N16890007: length 3.3
  TOP w0.5: Q11.1 188.42,18.02 R77.1 188.58,18.2 R76.2
N16890009: length 1.8
  TOP w0.5: Q11.2 190.32,17.76 R77.2
N16890028: length 2.1
  TOP w0.5: Q12.3 185.57,19.23 R79.1
N16890058: length 3.2
  TOP w0.5: R80.2 185.01,12.8 R81.2 184.61,14.79 Q12.2
N16890062: length 4.6
  TOP w0.5: Q12.1 186.31,15.66 R81.1 187.15,14.39 R78.1
N16893938: length 5.8
  TOP w0.5: L2.2 82.11,30.39 C2.1 82.48,29.64 U1.2
N16893954: length 3.9
  TOP w0.5: U1.8 91.35,32.39 90.78,32.96 C9.1
N16893996: length 2.3
  TOP w0.5: C6.1 93.63,28.37 U1.6
N16893998: length 2.3
  TOP w0.5: R6.1 93.58,27.1 U1.5
N16894036: length 16.7
  TOP w0.5: C1.2 v1(83.78,32.96)
  TOP w1: U1.3 v1(83.74,28.37) 83.27,27.9 L3.1 80.56,28.02 D2.2 77.12,28.02 D4.2
  BOTTOM w0.5: v1(83.78,32.96) 83.74,32.92 v1(83.74,28.37)
N16894056: length 2.3
  TOP w0.5: C1.1 86.27,31.46 U1.1
N16899965: length 5
  TOP w0.3: R866.1 105.93,46.39 103.44,46.39 J7.2
N16899968: length 11.1
  TOP w0.3: J7.3 103.36,45.91 106.32,45.91 R867.1
  TOP w0.5: J7.3 101.06,43.61 R868.1
N168879501: length 2
  TOP w0.5: Q7.3 91.72,10.08 92.22,9.58 R66.2
N168892401: length 2
  TOP w0.5: Q9.3 140.23,9.25 R72.2
N168900031: length 2
  TOP w0.5: Q11.3 190.03,13.82 R78.2
N168939841: length 1.2
  TOP w0.3: R7.1 94.94,29.58 C6.2

## Text on the board
DIMENSION: unit:mm
PLACE_BOUND_TOP: FIGURE | SIZE | 0.3 | 0.9 | 0.8 | 1.7018 | 3.0 | 3.9878 | 1.3x0.7 | 1.35x0.7 | 1.5x0.7 | 2.2x0.6 | DRILL CHART: TOP to BOTTOM | ALL UNITS ARE IN MILLIMETERS | TOLERANCE | +0.05/-0.05 | +0.0001/-0.0001 | +0.1/-0.1 | PLATED | NON-PLATED | QTY | 403 | 36 | 2 | 70 | 72
